# Altium PCB PCB1.PcbDoc (part 2 of 2)
Units mm, origin at the board's own origin, x right, y up, seen from the top; angles counter-clockwise.
Board outline 88.39 x 69.6 mm, 4 copper layers (Top Layer, Layer 2, Layer 3, Bottom Layer), stack 0.603 mm thick; 126 components, 120 nets, 462 pads, 224 vias.
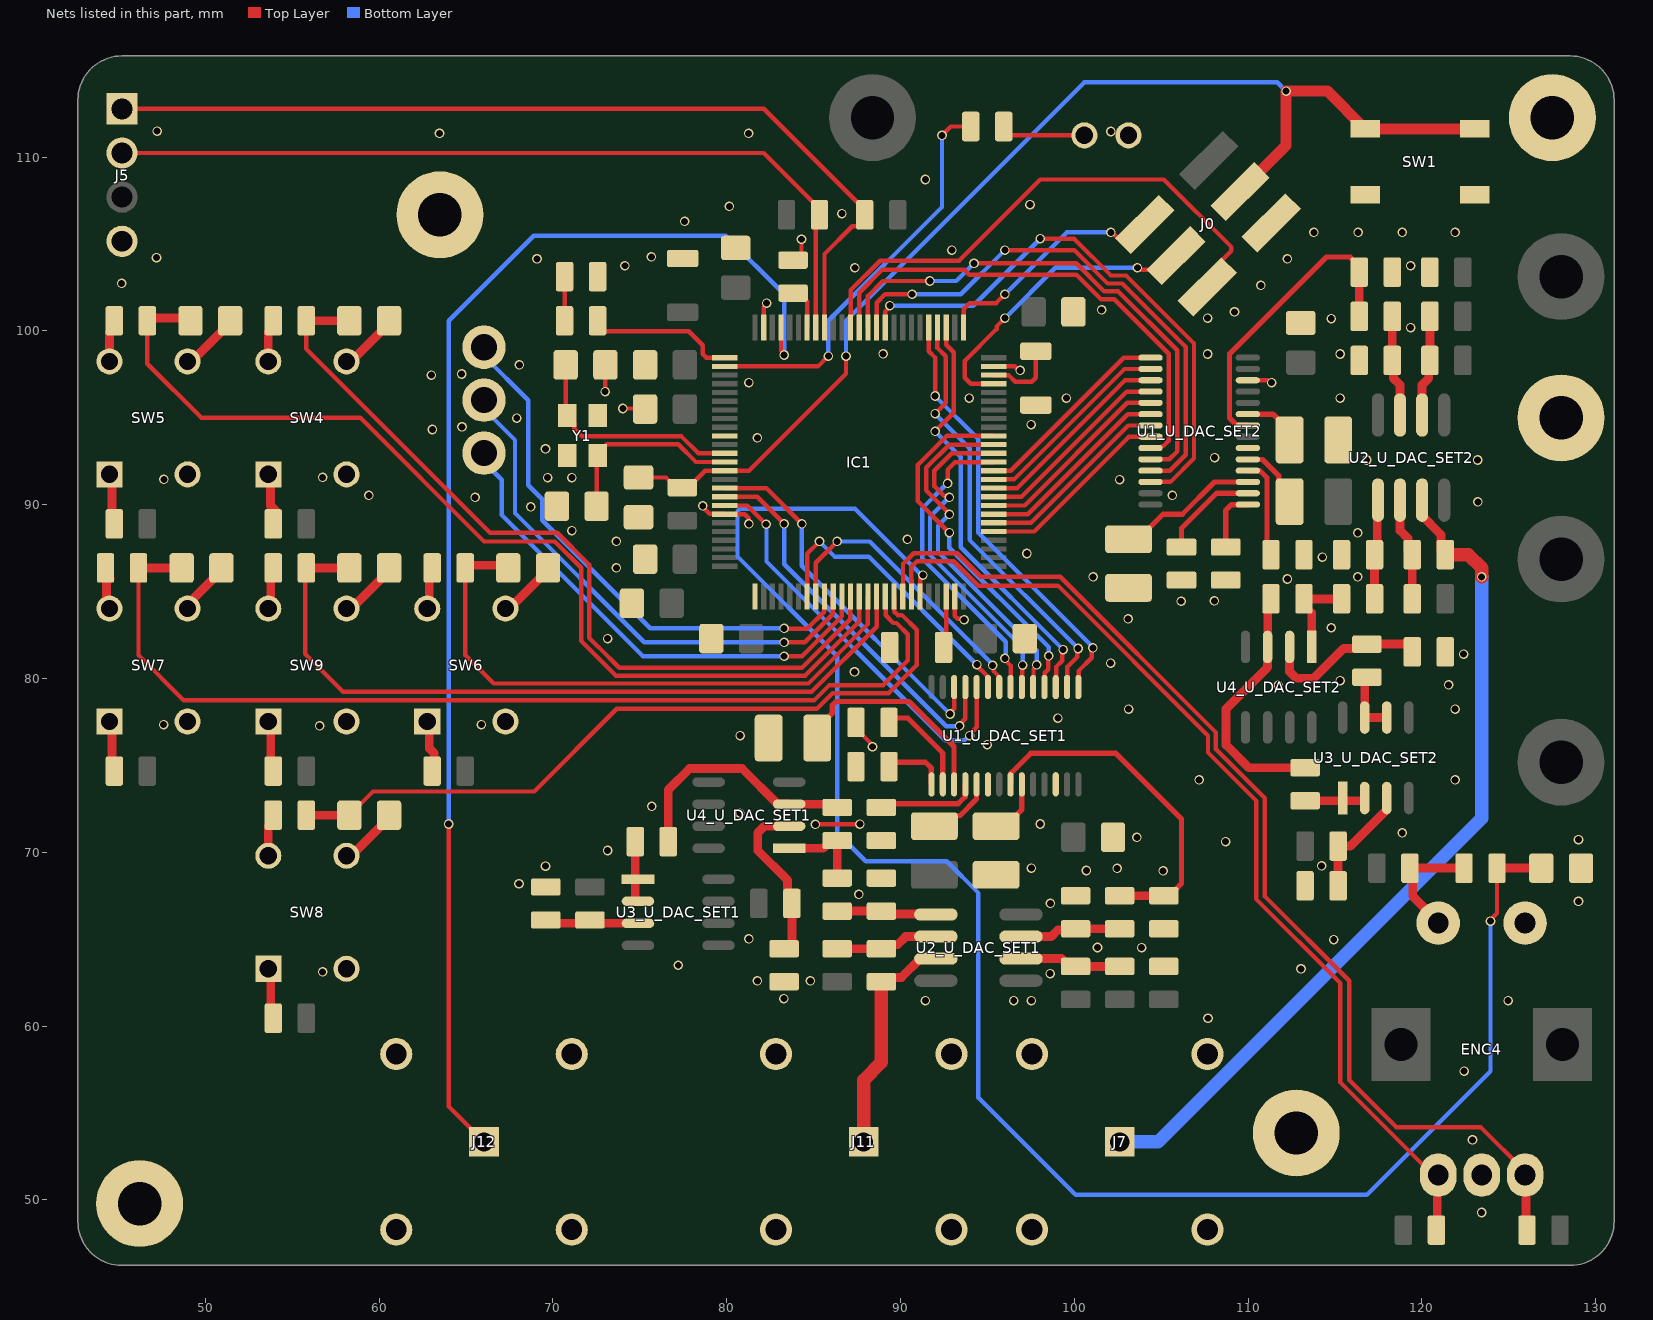
[diagram p4: the nets of this part, all layers, seen from the top]

## Via types
v1: diameter 0.55, hole 0.4, Top Layer to Bottom Layer, tented both sides, 224 vias

## Nets (pads, with @x,y where several pads share a name; then routed paths per layer and width w, separated by ;. In a path a pad name is that pad's centre, name@x,y a point inside that pad or via, vN(x,y) a via of type N, cw(c..) or ccw(c..) an arc to the next point about the centre after c; other vN are vias at no path point) (continued)
"Buffered STM_DAC_U_DAC_SET2": R22_U_DAC_SET2.2 U3_U_DAC_SET2.6 U3_U_DAC_SET2.7 | length 3.6
  Top Layer w0.508: U3_U_DAC_SET2.7@116.713,77.754 116.712,79.948 R22_U_DAC_SET2.2@116.84,80.076 ; U3_U_DAC_SET2.7@116.713,77.754 U3_U_DAC_SET2.6@117.983,77.754
Buffered_+1V65_U_DAC_SET1: R21_U_DAC_SET1.2 U3_U_DAC_SET1.1 U3_U_DAC_SET1.2 | length 3.6
  Top Layer w0.508: R21_U_DAC_SET1.2@74.742,70.612 74.742,67.199 74.758,67.183 U3_U_DAC_SET1.2@74.9,67.183
Buffered_+1V65_U_DAC_SET2: R21_U_DAC_SET2.2 U3_U_DAC_SET2.1 U3_U_DAC_SET2.2 | length 3.4
  Top Layer w0.508: R21_U_DAC_SET2.2@113.284,72.964 U3_U_DAC_SET2.2@116.697,72.964
DAC_BW_U_DAC_SET1: C17_U_DAC_SET1.1 U1_U_DAC_SET1.19 | length 3.9
  Top Layer w0.305: C17_U_DAC_SET1.1@91.948,71.504 92.566,72.122 93.439,72.122 94.378,73.062 94.378,73.899 U1_U_DAC_SET1.19@94.387,73.908
DAC_BW_U_DAC_SET2: C17_U_DAC_SET2.1 U1_U_DAC_SET2.19 | length 3.9
  Top Layer w0.305: U1_U_DAC_SET2.19@109.997,92.6 110.834,92.6 111.774,91.661 111.774,90.788 C17_U_DAC_SET2.1@112.392,90.17
DAC_BYP_U_DAC_SET1: C18_U_DAC_SET1.1 U1_U_DAC_SET1.23 | length 3.3
  Top Layer w0.305: C18_U_DAC_SET1.1@95.504,71.504 96.028,71.504 96.987,72.463 U1_U_DAC_SET1.23@96.987,73.908
DAC_BYP_U_DAC_SET2: C18_U_DAC_SET2.1 U1_U_DAC_SET2.23 | length 2.8
  Top Layer w0.305: U1_U_DAC_SET2.23@109.988,95.209 111.433,95.209 C18_U_DAC_SET2.1@112.392,94.25
DAC_IOUT_U_DAC_SET1: R12_U_DAC_SET1.2 R14_U_DAC_SET1.1 U1_U_DAC_SET1.22 | length 20.1
  Top Layer w0.305: U1_U_DAC_SET1.22@96.337,73.908 96.346,73.917 96.346,74.542 97.496,75.692 102.406,75.692 106.172,71.926 106.172,68.205 105.854,67.886 105.854,67.846 105.506,67.498 R14_U_DAC_SET1.1@105.156,67.498
  Top Layer w0.508: R12_U_DAC_SET1.2@102.616,67.498 R14_U_DAC_SET1.1@105.156,67.498
DAC_IOUT_U_DAC_SET2: R12_U_DAC_SET2.2 R14_U_DAC_SET2.1 U1_U_DAC_SET2.22 | length 17.8
  Top Layer w0.305: U1_U_DAC_SET2.22@109.971,94.542 109.945,94.568 109.354,94.568 109.26,94.661 108.932,94.989 108.932,98.679 109.22,98.966 109.243,98.99 114.505,104.251 115.875,104.251 116.398,103.728 R14_U_DAC_SET2.1@116.398,103.378
  Top Layer w0.508: R12_U_DAC_SET2.2@116.398,100.838 R14_U_DAC_SET2.1@116.398,103.378
DAC_PD_U_DAC_SET1: R7_U_DAC_SET1.2 U1_U_DAC_SET1.15 | length 3.8
  Top Layer w0.305: R7_U_DAC_SET1.2@89.342,74.93 89.342,75.184 91.44,75.184 91.778,74.846 91.778,73.917 U1_U_DAC_SET1.15@91.787,73.908
DAC_PD_U_DAC_SET2: R7_U_DAC_SET2.2 U1_U_DAC_SET2.15 | length 3.5
  Top Layer w0.305: R7_U_DAC_SET2.2@108.712,87.564 108.712,89.662 109.05,90 U1_U_DAC_SET2.15@109.979,90
DC-Diff_OP-AMP_U_DAC_SET1: R13_U_DAC_SET1.2 R19_U_DAC_SET1.1 U4_U_DAC_SET1.1 | length 5.1
  Top Layer w0.508: U4_U_DAC_SET1.1@83.596,70.231 85.563,70.231 86.01,70.678 R19_U_DAC_SET1.1@86.36,70.678 R13_U_DAC_SET1.2@86.36,68.514
DC-Diff_OP-AMP_U_DAC_SET2: R13_U_DAC_SET2.2 R19_U_DAC_SET2.1 U4_U_DAC_SET2.1 | length 4.1
  Top Layer w0.508: R19_U_DAC_SET2.1@113.218,84.582 R13_U_DAC_SET2.2@115.382,84.582 ; U4_U_DAC_SET2.1@113.665,81.818 R19_U_DAC_SET2.1@113.665,83.785
Diff(+)_U_DAC_SET1: R13_U_DAC_SET1.1 R17_U_DAC_SET1.1 U2_U_DAC_SET1.5 | length 5.8
  Top Layer w0.508: R13_U_DAC_SET1.1@86.36,66.614 R17_U_DAC_SET1.1@88.9,66.614 89.056,66.458 92.001,66.458 U2_U_DAC_SET1.5@92.038,66.421
Diff(+)_U_DAC_SET2: R13_U_DAC_SET2.1 R17_U_DAC_SET2.1 U2_U_DAC_SET2.5 | length 5.5
  Top Layer w0.508: R13_U_DAC_SET2.1@117.282,84.582 R17_U_DAC_SET2.1@117.282,87.122 ; R17_U_DAC_SET2.1@117.438,87.278 U2_U_DAC_SET2.5@117.438,90.223
Diff(-)_U_DAC_SET1: R9_U_DAC_SET1.2 R11_U_DAC_SET1.1 U2_U_DAC_SET1.6 | length 6
  Top Layer w0.508: R11_U_DAC_SET1.1@86.36,64.45 R9_U_DAC_SET1.2@88.9,64.45 89.146,64.696 89.842,64.696 90.297,65.151 U2_U_DAC_SET1.6@92.038,65.151
Diff(-)_U_DAC_SET2: R9_U_DAC_SET2.2 R11_U_DAC_SET2.1 U2_U_DAC_SET2.6 | length 5.6
  Top Layer w0.508: U2_U_DAC_SET2.6@118.745,90.26 118.745,88.519 119.2,88.064 R9_U_DAC_SET2.2@119.2,87.368 ; R11_U_DAC_SET2.1@119.446,84.582 R9_U_DAC_SET2.2@119.446,87.122
GND: C1.1 C2.1 C3.1 C4.1 C5.1 C6.1 C7.1 C8.1 C9.1 C10.1 C11.1 C12.1 C13.1 C14.1 C15_U_DAC_SET1.1 C15_U_DAC_SET2.1 C16_U_DAC_SET1.2 C16_U_DAC_SET2.2 C18_U_DAC_SET1.2 C18_U_DAC_SET2.2 C19.1 ENC4.C ENC4.E HB1.1 IC1.10 IC1.19 IC1.26 IC1.49 IC1.74 IC1.99 J0.6 J5.4 J7.2 J7.3 J7.4 J7.5 J11.2 J11.3 J11.4 J11.5 J12.2 J12.3 J12.4 J12.5 LED1.K LedO4.1 R4.1 R6_U_DAC_SET1.2 R6_U_DAC_SET2.2 R7_U_DAC_SET1.1 R7_U_DAC_SET2.1 R14_U_DAC_SET1.2 R14_U_DAC_SET2.2 R15_U_DAC_SET1.2 R15_U_DAC_SET2.2 R16_U_DAC_SET1.2 R16_U_DAC_SET2.2 R17_U_DAC_SET1.2 R17_U_DAC_SET2.2 R20_U_DAC_SET1.2 R20_U_DAC_SET2.2 R23_U_DAC_SET1.2 R23_U_DAC_SET2.2 Rset1_U_DAC_SET1.1 Rset1_U_DAC_SET2.1 SW1.1 SW1.2 SW4.3 SW5.3 SW6.3 SW7.3 SW8.3 SW9.3 U1_U_DAC_SET1.20 U1_U_DAC_SET1.26 U1_U_DAC_SET2.20 U1_U_DAC_SET2.26 Y1.2 Y1.4 ΜΗ1.1 ΜΗ2.1 ΜΗ3.1 ΜΗ4.1 | length 18.2
  Top Layer w0.254: v1(73.006,96.51) 73.006,98.025 C11.1@73.025,98.044 ; v1(74.035,95.536) 75.279,95.536 C5.1@75.311,95.504 ; v1(78.625,89.927) 78.625,89.868 79.018,89.476 79.872,89.476 IC1.19@79.892,89.456 81.043,89.456 81.28,89.219 v1(81.28,88.9) ; IC1.99@82.13,100.194 82.13,101.354 82.296,101.52 v1(82.296,101.6) ; R4.1@83.82,104.074 83.936,104.074 84.309,104.447 v1(84.309,105.273) ; v1(85.107,71.604) 85.114,71.61 87.66,71.61 v1(87.667,71.617) ; R6_U_DAC_SET1.2@87.442,77.47 87.442,77.12 88.335,76.227 88.335,76.13 v1(88.392,76.073) ; IC1.49@93.13,84.718 93.13,83.599 93.292,83.438 93.611,83.438 v1(93.668,83.381) ; IC1.74@95.368,97.956 96.576,97.956 96.803,97.73 v1(96.883,97.73) ; U1_U_DAC_SET2.26@109.988,97.159 111.138,97.159 111.279,97.018 v1(111.36,97.018)
  other v1: 123.444,49.276 122.917,53.457 122.428,57.404 107.696,60.452 91.44,61.468 96.52,61.468 97.536,61.468 124.968,61.468 83.293,61.585 81.769,62.601 84.817,62.601 98.617,63.019 56.75,63.121 113.049,63.292 77.216,63.5 101.339,64.523 103.876,64.509 114.933,64.971 81.28,65.024 98.624,67.061 129.013,67.173 87.611,67.58 68.053,68.189 105.12,68.926 100.704,68.951 97.536,69.088 102.47,69.078 69.577,69.205 114.234,69.215 73.152,70.104 108.712,70.612 129.013,70.729 103.601,70.856 118.872,71.12 98.044,71.628 80.761,72.253 75.692,72.644 107.188,74.168 121.92,74.168 94.996,76.2 80.772,76.708 56.577,77.273 47.606,77.345 65.894,77.345 99.06,77.724 103.124,78.232 121.92,78.232 111.741,79.619 121.539,79.629 115.297,79.873 87.357,80.381 102.089,80.889 122.409,81.397 73.152,82.296 114.789,82.921 103.105,83.429 106.153,84.445 108.069,84.463 112.268,85.725 101.092,85.852 116.313,85.842 73.66,86.36 114.281,86.985 97.279,87.192 73.66,87.884 90.405,88.001 116.313,88.382 71.101,88.509 68.728,89.876 123.226,90.16 65.532,90.424 59.417,90.541 105.645,90.541 47.625,91.452 102.616,91.44 56.75,91.569 69.704,91.557 71.101,91.557 116.821,92.573 123.211,92.573 108.08,92.71 69.577,93.208 81.769,93.843 63.066,94.325 64.773,94.481 97.517,94.605 67.924,94.986 93.961,96.129 99.549,96.129 115.297,96.129 81.28,97.028 63.017,97.459 64.749,97.518 68.072,98.044 89.008,98.681 107.677,98.669 115.297,98.669 119.361,100.193 114.789,100.701 107.677,100.732 109.22,101.092 101.581,101.209 110.744,102.616 45.193,102.733 87.376,103.632 74.149,103.749 119.361,103.749 69.088,104.14 112.268,104.14 47.196,104.215 75.673,104.257 92.964,104.648 113.792,105.664 116.332,105.664 118.872,105.664 121.92,105.664 77.578,106.301 86.631,106.75 80.159,107.159 97.456,107.268 91.44,108.712 63.481,111.369 81.261,111.369 102.108,111.472 47.237,111.496
I-V(+)_U_DAC_SET1: R8_U_DAC_SET1.1 R10_U_DAC_SET1.1 U2_U_DAC_SET1.2 | length 5.9
  Top Layer w0.508: U2_U_DAC_SET1.2@96.938,63.881 99.279,63.881 99.726,63.434 R8_U_DAC_SET1.1@100.076,63.434 R10_U_DAC_SET1.1@102.616,63.434
I-V(+)_U_DAC_SET2: R8_U_DAC_SET2.1 R10_U_DAC_SET2.1 U2_U_DAC_SET2.2 | length 5.8
  Top Layer w0.508: U2_U_DAC_SET2.2@120.015,95.16 120.015,96.901 120.396,97.282 R8_U_DAC_SET2.1@120.396,98.232 ; R8_U_DAC_SET2.1@120.462,98.298 R10_U_DAC_SET2.1@120.462,100.838
I-V(-)_U_DAC_SET1: R12_U_DAC_SET1.1 R16_U_DAC_SET1.1 U2_U_DAC_SET1.3 | length 5.9
  Top Layer w0.508: U2_U_DAC_SET1.3@96.938,65.151 98.679,65.151 99.06,65.532 100.01,65.532 R16_U_DAC_SET1.1@100.076,65.598 R12_U_DAC_SET1.1@102.616,65.598
I-V(-)_U_DAC_SET2: R12_U_DAC_SET2.1 R16_U_DAC_SET2.1 U2_U_DAC_SET2.3 | length 5.8
  Top Layer w0.508: R16_U_DAC_SET2.1@118.298,98.298 R12_U_DAC_SET2.1@118.298,100.838 ; R16_U_DAC_SET2.1@118.364,98.232 118.364,97.282 118.745,96.901 U2_U_DAC_SET2.3@118.745,95.16
LedON: IC1.2 R24.2 | length 23.5
  Top Layer w0.254: IC1.2@79.892,97.956 85.256,97.956 v1(85.852,98.552) ; v1(92.39,111.252) 92.898,111.76 R24.2@94.046,111.76
  Bottom Layer w0.254: v1(85.852,98.552) 85.852,100.584 92.39,107.122 v1(92.39,111.252)
NetC10_2: C10.2 IC1.13 Y1.1 | length 11
  Top Layer w0.254: C10.2@72.517,89.916 72.517,92.769 Y1.1@72.578,92.83 72.578,92.955 73.095,93.472 77.216,93.472 78.232,92.456 IC1.13@79.892,92.456
NetC11_2: C11.2 IC1.12 Y1.3 | length 13.1
  Top Layer w0.254: C11.2@70.739,98.044 70.739,95.219 71.226,94.732 71.226,94.382 71.679,93.929 77.405,93.929 78.379,92.956 IC1.12@79.892,92.956
NetC13_2: C13.2 IC1.48 | length 4.5
  Top Layer w0.254: IC1.48@92.63,84.718 92.63,81.936 C13.2@92.482,81.788 ; C13.2@92.482,81.788 C13.2@92.482,82.188 ; C13.2@92.482,81.788 C13.2@92.482,82.188 ; C13.2@92.482,82.188 92.241,82.429 C13.2@92.482,82.188
NetC14_2: C14.2 IC1.73 | length 4.2
  Top Layer w0.254: IC1.73@95.368,97.456 95.388,97.436 96.242,97.436 96.605,97.074 97.55,97.074 97.785,97.309 C14.2@97.785,98.832
NetC16_U_DAC_SET1_1: C16_U_DAC_SET1.1 U1_U_DAC_SET1.17 | length 12.6
  Top Layer w0.305: C16_U_DAC_SET1.1@85.216,76.576 85.216,77.151 86.082,78.017 86.082,78.46 86.297,78.676 90.488,78.676 93.087,76.077 U1_U_DAC_SET1.17@93.087,73.908
NetC16_U_DAC_SET2_1: C16_U_DAC_SET2.1 U1_U_DAC_SET2.17 | length 8.2
  Top Layer w0.305: C16_U_DAC_SET2.1@103.124,88.014 103.674,88.014 105.113,89.453 106.217,89.453 108.073,91.309 U1_U_DAC_SET2.17@109.988,91.309
NetC20_1: C20.1 SW4.4 | length 3.5
  Top Layer w0.508: SW4.4@58.13,98.246 58.391,98.246 60.579,100.434 C20.1@60.579,100.584
NetC21_1: C21.1 SW5.4 | length 3.5
  Top Layer w0.508: SW5.4@49.106,98.405 49.367,98.405 51.555,100.593 C21.1@51.555,100.743
NetC22_1: C22.1 SW6.4 | length 3.5
  Top Layer w0.508: SW6.4@67.394,84.181 67.655,84.181 69.843,86.369 C22.1@69.843,86.519
NetC23_1: C23.1 SW7.4 | length 3.1
  Top Layer w0.508: SW7.4@48.986,84.022 48.986,84.269 50.927,86.21 C23.1@50.927,86.36
NetC24_1: C24.1 SW8.4 | length 3.5
  Top Layer w0.508: SW8.4@58.13,69.798 58.391,69.798 60.579,71.986 C24.1@60.579,72.136
NetC25_1: C25.1 SW9.4 | length 3.5
  Top Layer w0.508: SW9.4@58.13,84.022 58.391,84.022 60.579,86.21 C25.1@60.579,86.36
NetENC4_D: ENC4.D R25.1 R27.2 | length 6.9
  Top Layer w0.508: ENC4.D@120.944,65.928 120.944,66.005 119.473,67.476 119.473,68.929 R25.1@119.314,69.088 R27.2@122.428,69.088
NetIC1_1: IC1.1 R5.2 | length 8.6
  Top Layer w0.254: R5.2@72.578,100.584 72.578,100.359 72.951,99.986 77.814,99.986 78.627,99.173 78.627,98.665 78.836,98.456 IC1.1@79.892,98.456
NetIC1_94: IC1.94 R4.2 | length 2.5
  Top Layer w0.254: R4.2@83.82,102.174 84.17,102.174 84.63,101.714 IC1.94@84.63,100.194
NetLED1_A: LED1.A R5.1 | length 2.5
  Top Layer w0.254: R5.1@70.678,100.584 LED1.A@70.678,103.124
NetLedO4_2: LedO4.2 R24.1 | length 4.9
  Top Layer w0.254: R24.1@95.946,111.76 95.946,111.625 96.319,111.252 LedO4.2@100.584,111.252
NetR6_U_DAC_SET1_1: R6_U_DAC_SET1.1 U1_U_DAC_SET1.16 | length 6
  Top Layer w0.305: R6_U_DAC_SET1.1@89.342,77.47 89.342,77.724 90.424,77.724 92.437,75.711 U1_U_DAC_SET1.16@92.437,73.908
NetR6_U_DAC_SET2_1: R6_U_DAC_SET2.1 U1_U_DAC_SET2.16 | length 5.7
  Top Layer w0.305: R6_U_DAC_SET2.1@106.172,87.564 106.172,88.646 108.185,90.659 U1_U_DAC_SET2.16@109.988,90.659
NetR18_U_DAC_SET1_2: R18_U_DAC_SET1.2 R20_U_DAC_SET1.1 U3_U_DAC_SET1.3 | length 5.4
  Top Layer w0.508: R20_U_DAC_SET1.1@69.596,66.106 69.782,65.92 74.893,65.92 U3_U_DAC_SET1.3@74.9,65.913
NetR18_U_DAC_SET2_2: R18_U_DAC_SET2.2 R20_U_DAC_SET2.1 U3_U_DAC_SET2.3 | length 6.6
  Top Layer w0.508: R20_U_DAC_SET2.1@115.184,68.072 R18_U_DAC_SET2.2@115.184,70.358 115.884,70.358 117.976,72.45 U3_U_DAC_SET2.3@117.976,73.115
NetR19_U_DAC_SET1_2: R19_U_DAC_SET1.2 R21_U_DAC_SET1.1 U4_U_DAC_SET1.3 | length 14.1
  Top Layer w0.508: R21_U_DAC_SET1.1@76.642,70.612 76.642,73.594 77.869,74.821 80.881,74.821 82.931,72.771 U4_U_DAC_SET1.3@83.596,72.771 83.603,72.764 86.174,72.764 R19_U_DAC_SET1.2@86.36,72.578
NetR19_U_DAC_SET2_2: R19_U_DAC_SET2.2 R21_U_DAC_SET2.1 U4_U_DAC_SET2.3 | length 13.6
  Top Layer w0.508: U4_U_DAC_SET2.3@111.125,81.153 111.125,80.645 108.737,78.257 108.737,76.175 110.048,74.864 R21_U_DAC_SET2.1@113.284,74.864 ; U4_U_DAC_SET2.3@111.132,81.825 R19_U_DAC_SET2.2@111.132,84.396
NetR22_U_DAC_SET1_1: R22_U_DAC_SET1.1 R23_U_DAC_SET1.1 U4_U_DAC_SET1.2 | length 9.7
  Top Layer w0.508: R23_U_DAC_SET1.1@83.312,64.45 83.508,64.45 83.754,64.696 R22_U_DAC_SET1.1@83.754,67.056 83.508,67.302 83.508,68.384 81.788,70.104 81.788,71.12 82.169,71.501 U4_U_DAC_SET1.2@83.596,71.501
NetR22_U_DAC_SET2_1: R22_U_DAC_SET2.1 R23_U_DAC_SET2.1 U4_U_DAC_SET2.2 | length 8.9
  Top Layer w0.508: U4_U_DAC_SET2.2@112.395,81.818 112.395,80.391 112.776,80.01 113.792,80.01 115.512,81.73 R22_U_DAC_SET2.1@116.594,81.73 ; R22_U_DAC_SET2.1@116.84,81.976 R23_U_DAC_SET2.1@119.2,81.976
NetR29_1: R29.1 SW4.1 | length 2.9
  Top Layer w0.508: SW4.1@53.762,91.659 53.762,89.955 54.046,89.671 54.046,89.032 R29.1@53.914,88.9
NetR30_1: R30.1 SW5.1 | length 3
  Top Layer w0.508: SW5.1@44.486,91.746 44.628,91.604 44.628,89.042 R30.1@44.77,88.9
NetR31_1: R31.1 SW6.1 | length 3.2
  Top Layer w0.508: SW6.1@62.894,77.681 62.894,75.977 63.178,75.693 63.178,74.796 R31.1@63.058,74.676
NetR32_2: R32.2 SW4.2 | length 2.5
  Top Layer w0.508: SW4.2@53.63,98.246 53.63,99.95 53.914,100.234 R32.2@53.914,100.584
NetR33_2: R33.2 SW5.2 | length 2.7
  Top Layer w0.508: SW5.2@44.486,98.246 44.486,99.95 44.89,100.354 R33.2@44.89,100.743
NetR34_2: R34.2 SW6.2 | length 2.5
  Top Layer w0.508: SW6.2@62.894,84.181 62.894,85.885 63.178,86.169 R34.2@63.178,86.519
NetR35_1: R35.1 SW7.1 | length 3
  Top Layer w0.508: SW7.1@44.486,77.522 44.628,77.38 44.628,74.818 R35.1@44.77,74.676
NetR36_1: R36.1 SW8.1 | length 2.8
  Top Layer w0.508: SW8.1@53.762,63.211 53.772,63.201 53.772,60.594 R36.1@53.914,60.452
NetR37_1: R37.1 SW9.1 | length 3
  Top Layer w0.508: SW9.1@53.63,77.522 53.848,77.304 53.772,77.228 53.772,74.818 R37.1@53.914,74.676
NetR38_2: R38.2 SW7.2 | length 2.7
  Top Layer w0.508: R38.2@44.262,86.36 44.262,86.01 44.516,85.756 44.319,85.56 SW7.2@44.319,83.812
NetR39_2: R39.2 SW8.2 | length 2.5
  Top Layer w0.508: SW8.2@53.63,69.798 53.63,71.502 53.914,71.786 R39.2@53.914,72.136
NetR40_2: R40.2 SW9.2 | length 2.4
  Top Layer w0.508: SW9.2@53.63,84.022 53.772,84.164 53.772,85.764 53.848,85.84 R40.2@53.848,86.36
NetRset1_U_DAC_SET1_2: Rset1_U_DAC_SET1.2 U1_U_DAC_SET1.18 | length 5.8
  Top Layer w0.305: Rset1_U_DAC_SET1.2@88.9,72.578 89.124,72.802 93.328,72.802 93.728,73.202 93.728,73.899 U1_U_DAC_SET1.18@93.737,73.908
NetRset1_U_DAC_SET2_2: Rset1_U_DAC_SET2.2 U1_U_DAC_SET2.18 | length 5.5
  Top Layer w0.305: U1_U_DAC_SET2.18@109.997,91.95 110.694,91.95 111.094,91.55 Rset1_U_DAC_SET2.2@111.094,87.346
NRST: C12.2 IC1.14 J0.4 R1.1 SW1.3 SW1.4 | length 67.8
  Top Layer w0.254: C12.2@74.93,91.567 76.511,91.567 77.097,90.981 R1.1@77.447,90.981 77.797,90.981 78.772,91.956 IC1.14@79.892,91.956 81.288,91.956 86.868,97.536 v1(86.868,98.552)
  Top Layer w0.635: J0.4@109.538,108.014 112.19,110.666 v1(112.19,113.792) 114.574,113.792 SW1.3@116.738,111.628 SW1.4@123.038,111.628
  Bottom Layer w0.254: v1(86.868,98.552) 86.868,100.584 100.584,114.3 111.682,114.3 v1(112.19,113.792)
Out1: J7.1 R9_U_DAC_SET2.1 U2_U_DAC_SET2.7 | length 47.8
  Top Layer w0.508: U2_U_DAC_SET2.7@120.015,89.36 121.1,88.275 R9_U_DAC_SET2.1@121.1,87.368
  Top Layer w0.762: R9_U_DAC_SET2.1@121.346,87.122 122.682,87.122 123.444,86.36 v1(123.444,85.852)
  Bottom Layer w0.762: J7.1@102.616,53.34 104.822,53.34 123.444,71.962 v1(123.444,85.852)
Out2: J11.1 R9_U_DAC_SET1.1 U2_U_DAC_SET1.7 | length 13.3
  Top Layer w0.508: R9_U_DAC_SET1.1@88.9,62.55 89.146,62.796 90.053,62.796 91.138,63.881 U2_U_DAC_SET1.7@92.038,63.881
  Top Layer w0.762: J11.1@87.884,53.34 87.884,56.896 88.9,57.912 R9_U_DAC_SET1.1@88.9,62.55
PC1_DAC12: IC1.16 U1_U_DAC_SET1.12 | length 21.4
  Top Layer w0.254: IC1.16@79.892,90.956 82.272,90.956 v1(84.328,88.9) ; v1(92.861,77.958) 92.858,77.958 92.858,78.035 93.087,78.264 U1_U_DAC_SET1.12@93.087,79.508
  Bottom Layer w0.254: v1(84.328,88.9) 84.328,86.485 92.858,77.955 v1(92.861,77.958)
PC2_DAC11: IC1.17 U1_U_DAC_SET1.11 | length 22.7
  Top Layer w0.254: IC1.17@79.892,90.456 81.756,90.456 v1(83.312,88.9) ; v1(93.411,77.277) 93.411,77.357 93.737,77.682 U1_U_DAC_SET1.11@93.737,79.508
  Bottom Layer w0.254: v1(83.312,88.9) 83.312,86.58 92.635,77.257 93.392,77.257 v1(93.411,77.277)
PC3_DAC10: IC1.18 U1_U_DAC_SET1.10 | length 24
  Top Layer w0.254: IC1.18@79.892,89.956 81.19,89.956 v1(82.271,88.875) ; v1(93.98,76.708) 93.98,76.788 94.387,77.195 U1_U_DAC_SET1.10@94.387,79.503
  Bottom Layer w0.254: v1(82.271,88.875) 82.296,88.85 82.296,86.729 92.571,76.454 93.683,76.454 93.937,76.708 v1(93.98,76.708)
PC4_DAC9: IC1.32 U1_U_DAC_SET1.9 | length 17
  Top Layer w0.254: IC1.32@84.63,84.718 84.63,87.17 v1(85.344,87.884) ; v1(94.398,80.796) 94.398,80.737 94.989,80.145 94.989,80.107 95.037,80.059 U1_U_DAC_SET1.9@95.037,79.508
  Bottom Layer w0.254: v1(85.344,87.884) 86.212,87.016 88.177,87.016 v1(94.398,80.796)
PC5_DAC8: IC1.33 U1_U_DAC_SET1.8 | length 17
  Top Layer w0.254: IC1.33@85.129,84.719 85.129,86.653 v1(86.36,87.884) ; v1(95.302,80.76) 95.359,80.704 95.359,80.426 95.639,80.145 95.639,80.107 95.687,80.059 U1_U_DAC_SET1.8@95.687,79.508
  Bottom Layer w0.254: v1(86.36,87.884) 88.237,87.884 95.302,80.819 v1(95.302,80.76)
PC6_DAC7: IC1.63 U1_U_DAC_SET1.7 | length 18.1
  Top Layer w0.254: v1(92.716,91.23) 92.712,91.234 92.712,92.013 93.135,92.436 95.348,92.436 IC1.63@95.368,92.456 ; v1(96.012,81.153) 96.012,81.073 96.337,80.748 U1_U_DAC_SET1.7@96.337,79.508
  Bottom Layer w0.254: v1(92.716,91.23) 92.694,91.23 91.246,89.781 91.246,86.916 96.054,82.108 96.054,81.195 v1(96.012,81.153)
PC7_DAC6: IC1.64 U1_U_DAC_SET1.6 | length 19.5
  Top Layer w0.254: v1(92.816,90.424) 92.759,90.481 92.538,90.481 91.948,91.071 91.948,91.948 92.956,92.956 IC1.64@95.368,92.956 ; U1_U_DAC_SET1.6@96.987,79.508 97.005,79.526 97.005,80.749 v1(97.028,80.772)
  Bottom Layer w0.254: v1(92.816,90.424) 91.703,89.311 91.703,87.105 97.028,81.78 v1(97.028,80.772)
PC8_DAC5: IC1.65 U1_U_DAC_SET1.5 | length 20.3
  Top Layer w0.254: v1(92.816,89.438) 92.816,89.496 91.491,90.821 91.491,92.137 92.809,93.456 IC1.65@95.368,93.456 ; U1_U_DAC_SET1.5@97.637,79.508 97.655,79.526 97.655,80.529 97.832,80.705 v1(97.832,80.786)
  Bottom Layer w0.254: v1(92.816,89.438) 92.16,88.782 92.16,87.295 97.832,81.623 v1(97.832,80.786)
PC9_DAC4: IC1.66 U1_U_DAC_SET1.4 | length 21.1
  Top Layer w0.254: v1(92.816,88.392) 91.006,90.202 91.006,92.299 92.663,93.956 IC1.66@95.368,93.956 ; U1_U_DAC_SET1.4@98.287,79.508 98.305,79.526 98.305,80.331 98.498,80.524 98.498,81.265 v1(98.533,81.299)
  Bottom Layer w0.254: v1(92.816,88.392) 92.816,87.524 98.533,81.807 v1(98.533,81.299)
PC10_DAC3: IC1.78 U1_U_DAC_SET1.3 | length 24.5
  Top Layer w0.254: v1(91.993,94.223) 93.061,95.291 93.061,98.766 92.63,99.198 IC1.78@92.63,100.194 ; U1_U_DAC_SET1.3@98.937,79.508 98.955,79.526 98.955,80.667 99.304,81.016 99.304,81.608 v1(99.36,81.664)
  Bottom Layer w0.254: v1(91.993,94.223) 93.472,92.744 93.472,87.553 v1(99.36,81.664)
PC11_DAC2: IC1.79 U1_U_DAC_SET1.2 | length 24.8
  Top Layer w0.254: v1(91.993,95.239) 92.604,95.85 92.604,98.541 92.13,99.015 IC1.79@92.13,100.194 ; U1_U_DAC_SET1.2@99.587,79.508 99.601,79.522 99.601,80.667 100.17,81.235 100.17,81.67 v1(100.226,81.726)
  Bottom Layer w0.254: v1(91.993,95.239) 93.98,93.252 93.98,87.972 v1(100.226,81.726)
PC12_DAC1: IC1.80 U1_U_DAC_SET1.1 | length 24.9
  Top Layer w0.254: IC1.80@91.63,100.194 91.63,98.833 91.993,98.469 v1(91.993,96.255) ; U1_U_DAC_SET1.1@100.237,79.508 100.255,79.526 100.255,80.119 100.268,80.132 100.268,80.456 101.01,81.198 101.01,81.706 v1(101.067,81.763)
  Bottom Layer w0.254: v1(91.993,96.255) 94.488,93.76 94.488,88.392 101.067,81.813 v1(101.067,81.763)
PD4-DAC12: IC1.85 U1_U_DAC_SET2.12 | length 32.6
  Top Layer w0.254: IC1.85@89.13,100.194 89.13,101.113 89.389,101.373 v1(89.389,101.453) ; v1(98.044,105.304) 99.992,105.304 102.11,103.186 102.984,103.186 106.891,99.278 106.891,92.666 105.534,91.309 U1_U_DAC_SET2.12@104.388,91.309
  Bottom Layer w0.254: v1(89.389,101.453) 94.193,101.453 v1(98.044,105.304)
PD5-DAC11: IC1.86 U1_U_DAC_SET2.11 | length 31.4
  Top Layer w0.254: IC1.86@88.63,100.194 88.63,101.621 89.118,102.109 v1(90.678,102.109) ; v1(96.012,104.648) 100.001,104.648 101.921,102.728 102.759,102.728 106.409,99.079 106.409,92.866 105.502,91.959 U1_U_DAC_SET2.11@104.388,91.959
  Bottom Layer w0.254: v1(90.678,102.109) 93.473,102.109 v1(96.012,104.648)
PD6-DAC10: IC1.87 U1_U_DAC_SET2.10 | length 30
  Top Layer w0.254: IC1.87@88.13,100.194 88.13,102.012 88.988,102.87 v1(91.694,102.87) ; v1(94.234,103.886) 100.117,103.886 101.731,102.271 102.534,102.271 105.926,98.879 105.926,93.066 105.469,92.609 U1_U_DAC_SET2.10@104.388,92.609
  Bottom Layer w0.254: v1(91.694,102.87) 93.218,102.87 v1(94.234,103.886)
PD7-DAC9: IC1.88 U1_U_DAC_SET2.9 | length 28.6
  Top Layer w0.254: IC1.88@87.63,100.194 87.63,102.194 88.962,103.526 93.666,103.526 93.962,103.23 100.126,103.23 101.542,101.814 102.308,101.814 105.444,98.679 105.444,93.689 105.133,93.378 105.058,93.378 104.939,93.259 U1_U_DAC_SET2.9@104.388,93.259
PD8-DAC8: IC1.55 U1_U_DAC_SET2.8 | length 11.3
  Top Layer w0.254: IC1.55@95.368,88.456 97.695,88.456 103.148,93.909 U1_U_DAC_SET2.8@104.388,93.909
PD9-DAC7: IC1.56 U1_U_DAC_SET2.7 | length 11.3
  Top Layer w0.254: IC1.56@95.368,88.956 97.512,88.956 103.115,94.559 U1_U_DAC_SET2.7@104.388,94.559
PD10-DAC6: IC1.57 U1_U_DAC_SET2.6 | length 11.4
  Top Layer w0.254: IC1.57@95.368,89.456 97.33,89.456 103.083,95.209 U1_U_DAC_SET2.6@104.388,95.209
PD11-DAC5: IC1.58 U1_U_DAC_SET2.5 | length 11.5
  Top Layer w0.254: IC1.58@95.368,89.956 97.148,89.956 103.051,95.859 U1_U_DAC_SET2.5@104.388,95.859
PD12-DAC4: IC1.59 U1_U_DAC_SET2.4 | length 11.5
  Top Layer w0.254: IC1.59@95.368,90.456 96.965,90.456 103.018,96.509 U1_U_DAC_SET2.4@104.388,96.509
PD13-DAC3: IC1.60 U1_U_DAC_SET2.3 | length 11.6
  Top Layer w0.254: IC1.60@95.368,90.956 96.718,90.956 102.921,97.159 U1_U_DAC_SET2.3@104.388,97.159
PD14-DAC2: IC1.61 U1_U_DAC_SET2.2 | length 11.7
  Top Layer w0.254: IC1.61@95.368,91.456 96.536,91.456 102.889,97.809 U1_U_DAC_SET2.2@104.388,97.809
PD15-DAC1: IC1.62 U1_U_DAC_SET2.1 | length 11.7
  Top Layer w0.254: IC1.62@95.368,91.956 96.354,91.956 102.857,98.459 U1_U_DAC_SET2.1@104.388,98.459
PWM0: IC1.34 J8.1 | length 31.4
  Top Layer w0.254: v1(83.312,82.888) 83.341,82.859 84.626,82.859 85.61,83.844 85.61,84.698 IC1.34@85.63,84.718
  Bottom Layer w0.254: J8.1@66.04,99.06 66.04,98.552 68.58,96.012 68.58,91.118 69.384,90.314 69.384,89.112 75.608,82.888 v1(83.312,82.888)
PWM1: IC1.35 J9.1 | length 30.3
  Top Layer w0.254: v1(83.312,82.084) 84.497,82.084 86.11,83.697 86.11,84.698 IC1.35@86.13,84.718
  Bottom Layer w0.254: J9.1@66.04,96.012 66.04,95.504 67.824,93.72 67.824,89.517 75.257,82.084 v1(83.312,82.084)
PWM2: IC1.36 J10.1 | length 29
  Top Layer w0.254: v1(83.312,81.28) 84.34,81.28 86.63,83.57 IC1.36@86.63,84.718
  Bottom Layer w0.254: J10.1@66.04,92.964 66.04,92.456 67.056,91.44 67.056,89.408 75.184,81.28 v1(83.312,81.28)
RTN_A: ENC4.A IC1.44 R26.1 | length 57.2
  Top Layer w0.254: IC1.44@90.63,84.718 90.65,84.738 90.65,85.665 90.63,85.685 90.63,86.427 90.951,86.748 93.075,86.748 94.479,85.344 99.06,85.344 107.696,76.708 107.696,75.743 110.463,72.977 110.463,67.318 115.316,62.464 115.316,56.757 120.645,51.428 ENC4.A@120.944,51.428
  Top Layer w0.508: R26.1@120.838,48.26 120.891,48.313 120.891,51.375 ENC4.A@120.944,51.428
RTN_B: ENC4.B IC1.43 R28.1 | length 63.3
  Top Layer w0.254: IC1.43@90.13,84.718 90.15,84.738 90.15,86.594 90.762,87.206 93.264,87.206 94.618,85.852 99.199,85.852 108.153,76.897 108.153,75.933 110.971,73.115 110.971,67.456 115.824,62.603 115.824,56.896 118.53,54.19 123.382,54.19 125.944,51.628 ENC4.B@125.944,51.428
  Top Layer w0.508: ENC4.B@125.944,51.428 125.997,51.375 125.997,48.313 R28.1@126.05,48.26
RTN_SW: C19.2 IC1.45 R27.1 | length 104.9
  Top Layer w0.254: IC1.45@91.13,84.718 91.15,84.738 91.15,85.731 91.286,85.868 v1(91.286,85.948) ; v1(123.952,66.04) 123.952,66.12 124.325,66.493 124.325,68.363 124.327,68.365 R27.1@124.328,69.088
  Top Layer w0.508: R27.1@124.328,69.088 C19.2@126.873,69.088
  Bottom Layer w0.254: v1(91.286,85.948) 91.208,85.948 87.388,89.768 80.773,89.768 80.624,89.619 80.624,87.016 86.36,81.28 86.36,71.12 87.999,69.481 92.659,69.481 94.488,67.652 94.488,55.88 100.076,50.292 116.84,50.292 123.952,57.404 v1(123.952,66.04)
SCL: IC1.92 J5.1 R2.2 | length 53.1
  Top Layer w0.254: J5.1@45.212,112.776 82.138,112.776 87.511,107.403 87.577,107.403 87.95,107.03 87.95,106.396 87.577,106.023 87.227,106.023 85.63,104.426 IC1.92@85.63,100.194
SDA: IC1.93 J5.2 R3.2 | length 48.4
  Top Layer w0.254: J5.2@45.212,110.236 82.138,110.236 85.344,107.03 R3.2@85.344,106.68 85.13,106.466 IC1.93@85.13,100.194
SnP1: C20.2 IC1.37 R32.1 | length 47.9
  Top Layer w0.254: R32.1@55.814,100.584 55.814,98.963 66.385,88.392 70.252,88.392 72.085,86.559 72.085,82.347 72.644,81.788 72.653,81.788 73.817,80.624 84.33,80.624 87.11,83.404 87.11,84.108 87.13,84.127 IC1.37@87.13,84.718
  Top Layer w0.508: R32.1@55.814,100.584 C20.2@58.293,100.584
SnP2: C21.2 IC1.38 R33.1 | length 58.6
  Top Layer w0.254: R33.1@46.67,100.624 46.67,98.11 49.784,94.996 58.928,94.996 66.04,87.884 70.113,87.884 71.628,86.369 71.628,82.157 73.619,80.167 84.52,80.167 87.63,83.277 IC1.38@87.63,84.718
  Top Layer w0.508: R33.1@46.79,100.743 C21.2@49.269,100.743
SnP3: C22.2 IC1.39 R34.1 | length 34.3
  Top Layer w0.254: R34.1@64.958,86.36 64.958,81.346 66.594,79.71 84.709,79.71 88.13,83.131 IC1.39@88.13,84.718
  Top Layer w0.508: R34.1@65.078,86.519 C22.2@67.557,86.519
SnP4: C25.2 IC1.40 R40.1 | length 44.6
  Top Layer w0.254: R40.1@55.748,86.36 55.748,81.412 57.912,79.248 84.894,79.248 88.63,82.984 IC1.40@88.63,84.718
  Top Layer w0.508: R40.1@55.748,86.36 C25.2@58.293,86.36
SnP5: C23.2 IC1.41 R38.1 | length 58.1
  Top Layer w0.254: R38.1@46.162,86.36 46.162,81.346 48.768,78.74 85.033,78.74 85.912,79.62 89.008,79.62 90.424,81.036 90.424,82.54 89.771,83.193 89.589,83.193 89.15,83.632 89.15,84.698 IC1.41@89.13,84.718
  Top Layer w0.508: R38.1@46.162,86.36 C23.2@48.641,86.36
SnP6: C24.2 IC1.42 R39.1 | length 43.3
  Top Layer w0.254: C24.2@58.293,72.136 59.653,73.496 68.924,73.496 73.684,78.256 85.195,78.256 86.097,79.158 89.318,79.158 90.932,80.772 90.932,82.804 90.086,83.65 89.843,83.65 89.65,83.844 89.65,84.698 IC1.42@89.63,84.718
  Top Layer w0.508: R39.1@55.814,72.136 C24.2@58.293,72.136
SW_CLK: IC1.72 J0.3 | length 17.6
  Top Layer w0.254: IC1.72@95.368,96.956 94.052,96.956 93.702,97.306 93.702,98.274 95.532,100.104 95.532,100.252 v1(96.012,100.732) ; v1(103.632,103.632) 103.712,103.632 103.824,103.52 105.044,103.52 J0.3@105.854,104.33
  Bottom Layer w0.254: v1(96.012,100.732) 98.912,103.632 v1(103.632,103.632)
SW_DIO: IC1.76 J0.1 | length 13.8
  Top Layer w0.254: IC1.76@93.63,100.194 93.653,100.217 93.653,101.273 93.98,101.6 95.504,101.6 v1(96.012,102.108) ; v1(102.108,105.664) 102.182,105.664 102.53,105.316 103.248,105.316 J0.1@104.058,106.126
  Bottom Layer w0.254: v1(96.012,102.108) 99.568,105.664 v1(102.108,105.664)
SW_O: IC1.89 J0.5 | length 31.2
  Top Layer w0.254: IC1.89@87.13,100.194 87.13,102.341 88.832,104.043 93.375,104.043 98.044,108.712 105.156,108.712 109.044,104.824 109.044,104.613 107.65,103.219 J0.5@107.65,102.534
Trigger: IC1.97 J12.1 | length 76
  Top Layer w0.254: v1(64.008,71.628) 64.008,55.372 J12.1@66.04,53.34 ; IC1.97@83.13,100.194 83.13,98.874 83.312,98.692 v1(83.312,98.612)
  Bottom Layer w0.254: v1(64.008,71.628) 64.008,100.584 68.905,105.481 79.939,105.481 83.312,102.108 v1(83.312,98.612)
pads on no net: ENC4.MH IC1.3 IC1.4 IC1.5 IC1.7 IC1.8 IC1.9 IC1.22 IC1.23 IC1.24 IC1.25 IC1.30 IC1.31 IC1.46 IC1.47 IC1.51 IC1.52 IC1.53 IC1.54 IC1.67 IC1.68 IC1.69 IC1.70 IC1.71 IC1.77 IC1.82 IC1.83 IC1.84 IC1.90 IC1.91 IC1.95 IC1.96 IC1.98 U1_U_DAC_SET1.13 U1_U_DAC_SET1.14 U1_U_DAC_SET1.25 U1_U_DAC_SET2.13 U1_U_DAC_SET2.14 U1_U_DAC_SET2.25 U4_U_DAC_SET1.5 U4_U_DAC_SET1.6 U4_U_DAC_SET1.7 U4_U_DAC_SET2.5 U4_U_DAC_SET2.6 U4_U_DAC_SET2.7

## Polygon pours and split planes (outlines as drawn)
GND on Layer 2 "NONET_L-01_P-001" (solid, remove dead copper, pour order 0): 142.261,129.783 134.641,34.279 34.548,43.788 32.508,117.756
GND on Layer 3 "NONET_L-01_P-001" (solid, remove dead copper, pour order 2): 145.669,121.666 142.621,37.338 36.449,35.814 32.639,124.714
GND on Bottom Layer "NONET_L-01_P-001" (solid, remove dead copper, pour order 3): 145.796,122.936 142.748,38.608 36.576,37.084 32.766,125.984
GND on Top Layer "NONET_L-01_P-001" (solid, remove dead copper, pour order 4): 143.565,124.047 140.517,39.719 34.345,38.195 30.535,127.095

## Silkscreen, mask and mechanical layers (free items; w line width, h text height)
Top Overlay:
  lines w0.254: 46.97,103.336 52.324,103.336 52.324,114.246 46.97,114.246 46.97,103.336
  text "+3V3" at 90.723,113.484 h1.5
  text "Reset" at 116.586,113.03 h1.52
  text "SCL" at 47.55,112.05 h1.52
  text "+3V3" at 109.23,111.134 h0.8
  text "NRST" at 111.149,109.648 h0.8
  text "SDA" at 47.498,109.437 h1.52
  text "GND" at 112.726,107.836 h0.8
  text "3V3" at 47.498,106.824 h1.52
  text "-12V" at 124.884,106.372 h1.5
  text "GND" at 47.538,104.211 h1.52
  text "SW_DIO" at 97.333,103.905 h0.8
  text "SW_CLK" at 99.455,102.382 h0.8
  text "SW_O" at 102.764,100.848 h0.8
  text "PWM0" at 60.143,98.194 h1
  text "GND" at 125.89,97.95 h1.5
  text "PWM1" at 60.31,95.146 h1
  text "PWM2" at 60.143,92.098 h1
  text "+5V" at 125.804,89.771 h1.5
  text "+12V" at 124.884,78.432 h1.5
  text "Trigger" at 61.214,60.706 h1.52
  text "OUT" at 76.962,59.69 h1.52
  text "OUT" at 109.474,59.69 h1.52
  text "2" at 78.486,57.658 h1.52
  text "1" at 111.324,57.567 h1.52

## Text inside footprints (layer, text, board x,y; h text height)
LED1: Mechanical 13 "+" at 69.861,102.124 h1 r180
LedO4: Top Overlay "+" at 97.184,111.103 h0.8